# Allegro board PRISON_GOD_SCH_V110.brd
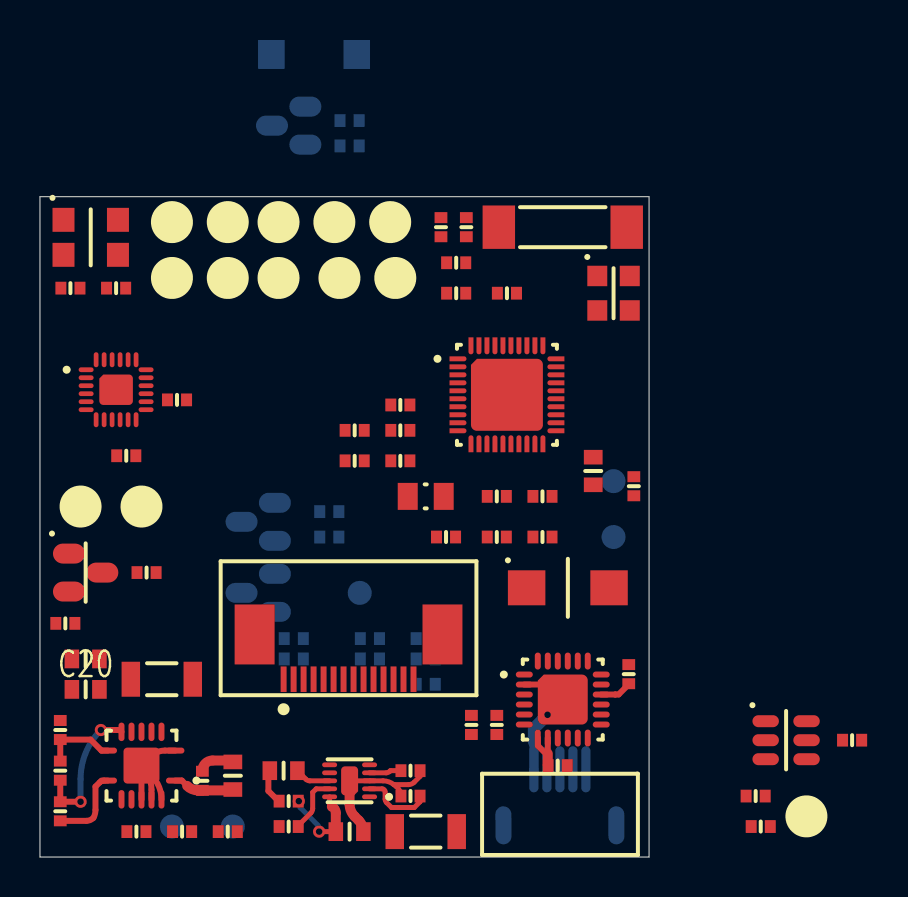
[diagram p0: board, top side]
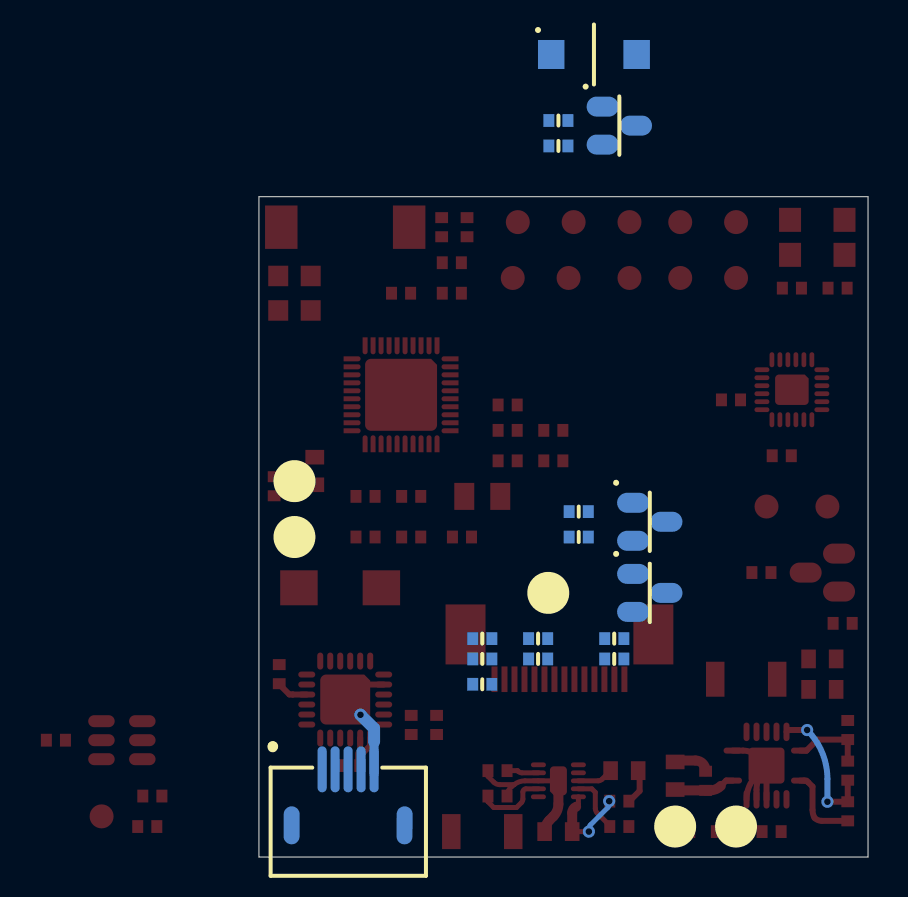
[diagram p1: board, bottom side, seen from below]

Outline 30.48 x 33.02 mm; copper layers: TOP, BOTTOM. Coordinates in mm from the lower left corner of the outline.
Outline path: 0,33.02 30.48,33.02 30.48,0 0,0 0,33.02

## Design rules (mm)
constraint set DEFAULT: min track width 0.127

## Placement (name value [footprint] x y rotation side)
ANT  ANTENNA  [ANT700X200-2N]  26.16 31.5 0 top
BAT+  BAT+  [TESTPOINT120]  6.6 1.52 180 bottom
BAT-  BAT-  [TESTPOINT120]  9.65 1.52 180 bottom
C1  100n  [RESC_0402]  4.83 1.27 0 top
C2  2.2p  [RESC_0402]  20.83 29.72 180 top
C3  100n  [RESC_0402]  23.37 28.19 0 top
C4  1.0u  [RESC_0402]  29.72 18.54 90 top
C5  1.0u  [RESC_0402]  25.15 18.03 180 top
C6  100n  [RESC_0402]  25.15 16 0 top
C7  1.0u  [RESC_0402]  22.86 18.03 0 top
C8  100n  [RESC_0402]  20.32 16 0 top
C9  100n  [RESC_0402]  18.03 22.61 0 top
C10  0-75p  [RESC_0402]  35.81 3.05 0 top
C11  100n  [RESC_0402]  40.64 5.84 0 top
C12  1u  [RESC_0402]  12.7 10.92 180 bottom
C13  4.7u  [RESC_0402]  19.3 10.92 180 bottom
C14  1u  [RESC_0402]  12.7 9.91 180 bottom
C15  2.2u  [RESC_0402]  19.3 9.91 180 bottom
C16  4.7u  [RESC_0402]  16.51 9.91 180 bottom
C17  1u  [RESC_0603]  15.49 1.27 0 top
C18  4.7u  [RESC_0603]  9.65 4.06 90 top
C19  0.1u  [RESC_0402]  8.13 3.81 90 top
C20  10u  [RESC_0603]  2.29 8.38 0 top
C21  10u  [RESC_0603]  2.29 9.91 0 top
C22  100n  [RESC_0402]  4.32 20.07 0 top
C23  10UF  [RESC_1206]  19.3 1.27 180 top
C24  4.7u  [RESC_0402]  29.46 9.14 270 top
C25  100n  [RESC_0402]  22.86 6.6 270 top
C26  100n  [RESC_0402]  21.59 6.6 270 top
C27  1.0u  [RESC_0402]  25.91 4.57 180 top
C28  100n  [RESC_0402]  6.86 22.86 0 top
CHR_LED  LED  [RESC_0603]  12.19 4.32 180 top
DA_RES  BUTTON  [BUTTON300X400X200-2N]  26.42 13.46 0 top
INTA  INTA  [TESTPOINT120]  28.7 18.8 180 bottom
INTB  INTB  [TESTPOINT120]  28.7 16 180 bottom
INTC  INTC  [TESTPOINT120]  17.53 31.75 0 top
INTD  INTD  [TESTPOINT120]  14.73 31.75 0 top
J_GND  GND  [TESTPOINT120]  9.4 28.96 0 top
J_VCC  J_VCC  [TESTPOINT120]  6.6 28.96 0 top
L1  DNP  [RESC_0402]  21.34 31.5 90 top
L2  7.5n  [RESC_0402]  20.07 31.5 90 top
L3  3.9n  [RESC_0402]  20.83 28.19 0 top
L4  2.2u  [RESC_0603]  27.69 19.3 270 top
L5  4.7u  [RESC_1206]  6.1 8.89 180 top
LED  RED_GREEN  [RGB_COM_A_3528-4N]  2.54 30.99 0 top
PAD  PAD  [TESTPOINT120]  38.35 2.03 0 top
Q1  SI2302DS  [SOT95P237X112-3N]  12.45 36.58 180 bottom
Q2  SI2302DS  [SOT95P237X112-3N]  2.29 14.22 0 top
Q3  Si2301BDS  [SOT95P237X112-3N]  10.92 13.21 180 bottom
Q4  SI2302DS  [SOT95P237X112-3N]  10.92 16.76 180 bottom
R1  10k  [RESC_0402]  9.4 1.27 0 top
R2  10k  [RESC_0402]  7.11 1.27 180 top
R3  10k  [RESC_0402]  18.03 21.34 0 top
R4  10k  [RESC_0402]  18.03 19.81 0 top
R5  10k  [RESC_0402]  15.75 21.34 0 top
R6  10k  [RESC_0402]  15.75 19.81 0 top
R7  10k  [RESC_0402]  22.86 16 0 top
R8  100  [RESC_0402]  15.49 35.56 180 bottom
R9  100  [RESC_0402]  5.33 14.22 0 top
R10  100  [RESC_0402]  1.52 28.45 0 top
R11  100  [RESC_0402]  3.81 28.45 0 top
R12  100  [RESC_0402]  15.49 36.83 180 bottom
R13  100  [RESC_0402]  1.27 11.68 0 top
R14  1-10k  [RESC_0402]  36.07 1.52 0 top
R15  47k  [RESC_0402]  14.48 17.27 180 bottom
R16  47k  [RESC_0402]  14.48 16 180 bottom
R17  10k  [RESC_0402]  16.51 10.92 180 bottom
R18  560k  [RESC_0402]  19.3 8.64 180 bottom
R19  500  [RESC_0402]  18.54 3.05 0 top
R20  250  [RESC_0402]  18.54 4.32 0 top
R21  10k  [RESC_0402]  12.45 1.52 180 top
R22  1.5k  [RESC_0402]  12.45 2.79 0 top
R23  158k  [RESC_0402]  1.02 2.29 90 top
R24  90k  [RESC_0402]  1.02 6.35 90 top
R25  15k  [RESC_0402]  1.02 4.32 90 top
RES  RES  [TESTPOINT120]  16 13.21 180 bottom
RXD  RX  [TESTPOINT120]  9.4 31.75 0 top
SOUNDER  R  [DET402_450X300-2N]  13.72 40.13 180 bottom
SWCLK  SWCLK  [TESTPOINT120]  14.99 28.96 0 top
SWDIO  SWDIO  [TESTPOINT120]  11.94 28.96 0 top
TXD  TX  [TESTPOINT120]  11.94 31.75 0 top
U1  DA14583_QFN40  [QFN40P500X500X80-41N]  23.37 23.11 0 top
U2  ASC0111B  [SOT95P237X292-6N]  37.34 5.84 0 top
U3  OLED_DIS_64_32  [FPC14N_1280X670X200-16N]  12.19 8.89 180 top
U4  BQ24050  [SON40P200X200X80-11N]  15.49 3.81 180 top
U5  TPS62736_PVQFN14  [QFN14P350X350X80-15N]  5.08 4.57 180 top
U6  MPU9250  [QFN24P300X300X100-25N]  3.81 23.37 0 top
U7  CP2104_QFN24  [QFN24P400X400X80-25N]  26.16 7.87 0 top
U_GND  GND  [TESTPOINT120]  6.6 31.75 0 top
USB  MICRO USB  [MICROUSB]  29.72 -1.02 180 bottom
VM+  VM+  [TESTPOINT120]  2.03 17.53 0 top
VM-  VM-  [TESTPOINT120]  5.08 17.53 0 top
VPP  VPP  [TESTPOINT120]  17.78 28.96 0 top
Y1  16MHZ  [OSCCC200X250X90-4N]  28.7 28.19 0 top
Y2  32KHZ  [OSCCC200X120X60-2N]  19.3 18.03 0 top

## Library data of the parts
ANT = ANTENNA_0
BAT+ BAT- INTA INTB INTC INTD J_GND J_VCC PAD RES RXD SWCLK SWDIO TXD U_GND VM+ VM- VPP = TEST POINT
C1-C22 C24-C28 = CAP NP
C23 = CAP
CHR_LED = LED
DA_RES = SW PUSHBUTTON
L1-L5 = INDUCTOR
LED = LED BI-COLOUR_0
Q1 Q2 Q4 = MOSFET_I_EN_GSD: room: motor
Q3 = Si2301BDS_0
R1-R25 SOUNDER = R
U1 = DA14583_QFN40
U2 = ASC0111B_0
U3 = OLED_DIS_64_0
U4 = BQ24050
U5 = TPS62736_PVQFN14_2
U6 = MPU9250_1
U7 = CP2104_QFN24_0
USB = MICROUSB_1
Y1 = CRYSTAL14
Y2 = CRYSTAL

## Footprints (pads in the part's own frame, mm; a bottom-side part is the same pattern mirrored in y, then rotated)
ANT700X200-2N
  rect 1.625x2.17 smd: 1(-3.2,0) 2(3.2,0)
BUTTON300X400X200-2N
  rect 1.875x1.75 smd: 1(-2.062,0) 2(2.062,0)
DET402_450X300-2N
  rect 1.325x1.45 smd: 1(-2.138,0) 2(2.138,0)
FPC14N_1280X670X200-16N
  rect 0.3x1.28 smd: 1(0,0) 2(-0.5,0) 3(-1,0) 4(-1.5,0) 5(-2,0) 6(-2.5,0) 7(-3,0) 8(-3.5,0) 9(-4,0) 10(-4.5,0) 11(-5,0) 12(-5.5,0) 13(-6,0) 14(-6.5,0)
  rect 2x3 smd: M1(-7.95,-2.24) M2(1.45,-2.24)
MICROUSB
  round 0 hole 0.6: (1.7,4.5) (5.7,4.5)
  oval 0.46x2.3 smd: 1(2.4,5.4) 2(3.05,5.4) 3(3.7,5.4) 4(4.35,5.4) 5(5,5.4)
  oval 1.9x0.8 smd rot 90.3: 6(6.525,2.6) 7(0.875,2.6)
OSCCC200X120X60-2N
  rect 1x1.35 smd: 1(-0.9,0) 2(0.9,0)
OSCCC200X250X90-4N
  rect 1x1.025 smd: 1(-0.812,0.863) 2(-0.812,-0.863) 3(0.812,-0.863) 4(0.812,0.863)
QFN14P350X350X80-15N
  oval 0.925x0.3 smd: 1(-1.688,0.75) 7(1.688,0.75) 8(1.688,-0.75) 14(-1.688,-0.75)
  oval 0.3x0.925 smd: 2(-1,1.688) 3(-0.5,1.688) 4(0,1.688) 5(0.5,1.688) 6(1,1.688) 9(1,-1.688) 10(0.5,-1.688) 11(0,-1.688) 12(-0.5,-1.688) 13(-1,-1.688)
  custom 1.8x1.8 smd: 15(0,0)
QFN24P300X300X100-25N
  oval 0.75x0.238 smd: 1(-1.5,1) 2(-1.5,0.6) 3(-1.5,0.2) 4(-1.5,-0.2) 5(-1.5,-0.6) 6(-1.5,-1) 13(1.5,-1) 14(1.5,-0.6) 15(1.5,-0.2) 16(1.5,0.2) 17(1.5,0.6) 18(1.5,1)
  oval 0.238x0.75 smd: 7(-1,-1.5) 8(-0.6,-1.5) 9(-0.2,-1.5) 10(0.2,-1.5) 11(0.6,-1.5) 12(1,-1.5) 19(1,1.5) 20(0.6,1.5) 21(0.2,1.5) 22(-0.2,1.5) 23(-0.6,1.5) 24(-1,1.5)
  custom 1.68x1.52 smd: 25(0,0)
QFN24P400X400X80-25N
  oval 0.85x0.3 smd: 1(-1.925,1.25) 2(-1.925,0.75) 3(-1.925,0.25) 4(-1.925,-0.25) 5(-1.925,-0.75) 6(-1.925,-1.25) 13(1.925,-1.25) 14(1.925,-0.75) 15(1.925,-0.25) 16(1.925,0.25) 17(1.925,0.75) 18(1.925,1.25)
  oval 0.3x0.85 smd: 7(-1.25,-1.925) 8(-0.75,-1.925) 9(-0.25,-1.925) 10(0.25,-1.925) 11(0.75,-1.925) 12(1.25,-1.925) 19(1.25,1.925) 20(0.75,1.925) 21(0.25,1.925) 22(-0.25,1.925) 23(-0.75,1.925) 24(-1.25,1.925)
  custom 2.5x2.5 smd: 25(0,0)
QFN40P500X500X80-41N
  custom 0.85x0.25 smd: 1(-2.45,1.8) 2(-2.45,1.4) 3(-2.45,1) 4(-2.45,0.6) 5(-2.45,0.2) 6(-2.45,-0.2) 7(-2.45,-0.6) 8(-2.45,-1) 9(-2.45,-1.4) 10(-2.45,-1.8) 21(2.45,-1.8) 22(2.45,-1.4) 23(2.45,-1) 24(2.45,-0.6) 25(2.45,-0.2) 26(2.45,0.2) 27(2.45,0.6) 28(2.45,1) 29(2.45,1.4) 30(2.45,1.8)
  custom 0.25x0.85 smd: 11(-1.8,-2.45) 12(-1.4,-2.45) 13(-1,-2.45) 14(-0.6,-2.45) 15(-0.2,-2.45) 16(0.2,-2.45) 17(0.6,-2.45) 18(1,-2.45) 19(1.4,-2.45) 20(1.8,-2.45) 31(1.8,2.45) 32(1.4,2.45) 33(1,2.45) 34(0.6,2.45) 35(0.2,2.45) 36(-0.2,2.45) 37(-0.6,2.45) 38(-1,2.45) 39(-1.4,2.45) 40(-1.8,2.45)
  custom 3.6x3.6 smd: 41(0,0)
RESC_0402
  rect 0.55x0.64 smd: 1(-0.477,0) 2(0.477,0)
RESC_0603
  rect 0.73x0.94 smd: 1(-0.69,0) 2(0.69,0)
RESC_1206
  rect 0.925x1.75 smd: 1(-1.55,0) 2(1.55,0)
RGB_COM_A_3528-4N
  rect 1.1x1.2 smd: 1(-1.363,0.875) 2(-1.363,-0.875) 3(1.363,-0.875) 4(1.363,0.875)
SON40P200X200X80-11N
  oval 0.75x0.24 smd: 1(-1,0.8) 2(-1,0.4) 3(-1,0) 4(-1,-0.4) 5(-1,-0.8) 6(1,-0.8) 7(1,-0.4) 8(1,0) 9(1,0.4) 10(1,0.8)
  custom 0.85x1.45 smd: 11(0,0)
SOT95P237X112-3N
  oval 1.6x1 smd: 1(-0.835,0.95) 2(-0.835,-0.95) 3(0.835,0)
SOT95P237X292-6N
  oval 1.325x0.6 smd: 1(-1.022,0.95) 2(-1.022,0) 3(-1.022,-0.95) 4(1.022,-0.95) 5(1.022,0) 6(1.022,0.95)
TESTPOINT120
  round 1.2 smd: 1(0,0)

## Nets
GND: BAT-.1 C1.1 C3.2 C4.2 C5.1 C6.2 C7.2 C8.2 C9.2 C10.2 C11.1 C13.1 C15.1 C16.2 C17.2 C18.2 C19.2 C20.1 C21.1 C22.2 C23.1 C24.1 C25.1 C26.1 C27.1 C28.1 DA_RES.2 J_GND.1 L1.2 L2.2 L3.2 Q1.2(S) Q2.2(S) Q4.2(S) R1.2 R7.2 R16.1 R18.1 R19.1 R20.2 R21.2 R24.2 U1.16 U1.23 U1.34 U1.41 U2.2 U2.4 U2.6 U3.7(VSS) U4.3(VSS) U4.11 U5.2 U5.3 U5.4 U5.5 U5.12(VSS) U5.14 U5.15 U6.18 U6.20 U6.25 U7.2 U7.25 U_GND.1 USB.5 USB.6 USB.7 Y1.2 Y1.3
VBAT: BAT+.1 C17.1 C18.1 C19.1 J_VCC.1 Q3.2(S) R2.1 R15.1 R22.2 SOUNDER.1 U4.10 U5.1 VM+.1
VBAT_AD: C1.2 R1.1 R2.2 U1.1
VBUS: C23.2 C27.2 U4.1 U7.7 U7.8 USB.1(VBUS)
VCC_3V: C6.1 C7.1 C8.1 C9.1 C11.2 C16.1 C20.2 C21.2 C25.2 C28.2 DA_RES.1 L5.2 LED.3 LED.4 R3.2 R4.2 R5.1 R6.1 R17.1 U1.5 U1.14 U1.15 U2.5(VDD) U3.8 U5.11 U6.1 U6.8(VDDIO) U6.9 U6.13 U6.22 U7.5 U7.9
VIN_OK: U1.22 U5.10
VIN_OK_SET: U1.24 U5.6
CHR_SET: U1.13 U4.7
D+: U4.5 U7.3 USB.3
D-: U4.6 U7.4 USB.2
DA_RST: R7.1 U1.17
I2C_SCL_1: R4.1 U1.9 U3.11
I2C_SCL_2: R5.2 U1.6 U6.23
I2C_SDA_1: R3.1 U1.10 U3.10
I2C_SDA_2: R6.2 U1.7 U6.24
INTA: INTA.1 U1.18
INTB: INTB.1 U1.20
INTC: INTC.1 U1.39
INTD: INTD.1 U1.40
LED1: R10.2 U1.33
LED2: R11.2 U1.36
MOTOR: R13.1 U1.2
MPU_FSYNC: U1.37 U6.11
MPU_INT: U1.8 U6.12
OLED_RES: R17.2 RES.1 U3.9
OLED_VBAT: Q3.3 U3.5
OLED_VBAT_SW: Q4.1 R16.2 U1.28
SOUNDER: R12.1 U1.32
SWCLK: SWCLK.1 U1.26
SWDIO: SWDIO.1 U1.25
TOUCH: U1.27 U2.1
UART_RX: RXD.1 U1.4 U7.21
UART_TX: TXD.1 U1.3 U7.20
VDCDC: C3.1 C4.1 C5.2 L4.2 U1.19 U1.31
VPP: U1.38 VPP.1
N650552: C2.2 L2.1 L3.1 U1.35
N650846: L4.1 U1.21
N657737: U1.11 Y2.1
N657743: U1.12(XTAL32KP) Y2.2
N658494: U1.29 Y1.4
N658507: U1.30 Y1.1
N680797: ANT.1 C2.1 L1.1
N748992: R19.2 U4.2
N749044: R20.1 U4.4
N749072: R21.1 U4.9
N749104: CHR_LED.1(CATHODE) U4.8
N749108: CHR_LED.2 R22.1
N749358: L5.1 U5.13
N749416: R24.1 R25.2 U5.8
N749488: R23.2 R25.1 U5.9
N750591: C22.1 U6.10
N751124: R8.1 SOUNDER.2
N751136: R9.1 VM-.1
N751236: Q1.3 R8.2
N751248: Q2.3 R9.2
N751256: Q1.1 R12.2
N751260: Q2.1 R13.2
N752175: C12.2 U3.1
N752329: Q3.1 Q4.3 R15.2
N752341: C12.1 U3.2
N752385: C14.2 U3.3
N752391: C14.1 U3.4
N752429: R18.2 U3.12
N752435: C15.2 U3.13
N752441: C13.2 U3.14
N753230: LED.1 R10.1
N753234: LED.2(YG_C) R11.1
N753932: C24.2 U7.16(VPP)
N754493: C10.1 R14.2 U2.3
N766501: PAD.1 R14.1
N768010: C26.2 U7.6
N7492626: R23.1 U5.7

Pads without a net: ANT 2; U3 6 M1 M2; U6 2 3 4 5 6 7 14 15 16 17 19 21; U7 1 10 11 12 13 14 15 17 18 19 22 23 24; USB 4

## Via types
v1: diameter 0.61, hole 0.33, TOP to BOTTOM, 5 vias

## Routing (per net, layer and track width the routed paths; a pad name or vN(x,y) marks a point on that pad's centre or on a via; arc(x,y) is an arc through that point)
GND: length 22.4
  TOP w0.25: 17.71,3.62 17.84,3.51 arc(18.01,3.31) R19.1 ; 17.71,3.62 18.44,3.62 arc(18.59,3.65) 18.72,3.74 19.02,4.03 R20.2 ; 17.71,3.62 arc(17.45,3.76) 17.17,3.81 U4.3 U4.11
  TOP w0.3: U5.15 5.53,5.02 arc(5.86,5.24) 6.26,5.32 U5.14 ; U5.15 U5.4 ; U5.15 5.59,4.06 arc(5.95,3.52) U5.2 ; U5.15 arc(5.45,4.02) 5.58,3.36 U5.3 ; U7.2 25.41,8.62 U7.25
  TOP w0.5: C18.2 9.48,4.83 8.64,4.83 arc(8.28,4.68) 8.13,4.32 C19.2 ; 1.6,8.31 C20.1 ; U4.11 15.49,2.65 arc(15.56,2.31) 15.75,2.03 15.95,1.83 arc(16.12,1.57) C17.2
  BOTTOM w0.45: 24.72,5.76 USB.5 24.72,4.13
  BOTTOM w0.6: 24.72,5.76 24.72,6.43 v1(25.4,7.11)
VBAT: length 7.7
  TOP w0.25: 14.61,2.51 14.56,2.53 14.49,2.64 U4.10 ; C17.1 v1(13.97,1.27)
  TOP w0.3: U5.1 7.1,3.82 7.37,3.56
  TOP w0.5: C17.1 14.8,2.21 arc(14.75,2.39) 14.61,2.51 ; C18.1 9.55,3.33 C19.1 7.91,3.33 arc(7.61,3.39) 7.37,3.56
  BOTTOM w0.25: v1(13.97,1.27) 13.97,1.42 arc(13.95,1.52) 13.9,1.6 13.03,2.47 arc(12.97,2.55) 12.95,2.64 v1(12.95,2.79)
VBUS: length 2.4
  TOP w0.3: U7.7 24.91,5.57 25.31,5.17 25.41,5.17 U7.8
  TOP w0.5: 25.41,5.17 25.41,4.59 C27.2
N748992: length 3.6
  TOP w0.25: U4.2 17.12,3.41 arc(17.23,3.37) 17.27,3.26 17.27,2.9 arc(17.29,2.8) 17.35,2.72 17.59,2.48 18.73,2.48 19.02,2.76 R19.2
N749044: length 1.6
  TOP w0.25: R20.1 17.54,4.32 17.5,4.28 arc(17.42,4.23) 17.33,4.21 U4.4
N749072: length 2.9
  TOP w0.25: R21.1 12.92,1.57 13.55,2.2 arc(13.62,2.3) 13.65,2.42 13.65,3.23 13.82,3.41 U4.9
N749104: length 1.8
  TOP w0.25: CHR_LED.1 13.31,3.89 arc(13.4,3.83) 13.5,3.81 U4.8
N749108: length 1.8
  TOP w0.3: R22.1 11.94,2.79 11.43,3.3 11.43,4.25 CHR_LED.2
N749416: length 3.7
  TOP w0.3: R25.2 R24.1 2.53,5.87 3.08,5.32 U5.8
N749488: length 7
  TOP w0.3: R25.1 R23.2 v1(2.03,2.76) ; v1(3.05,6.35) 3.99,6.35 U5.9
  BOTTOM w0.3: v1(2.03,2.76) 2.03,3.9 arc(2.3,5.22) v1(3.05,6.35)
N753932: length 1.6
  TOP w0.3: C24.2 29.46,8.64 28.96,8.13 28.79,8.13 28.79,8.12 U7.16
N7492626: length 4
  TOP w0.3: U5.7 3.2,3.82 arc(3.09,3.8) 2.99,3.73 2.78,3.52 2.78,2.35 arc(2.75,2.15) 2.67,1.96 arc(2.51,1.85) 2.32,1.81 R23.1
